# EAGLE board Board_4Layer_R2 (EAGLE 7.3.0)
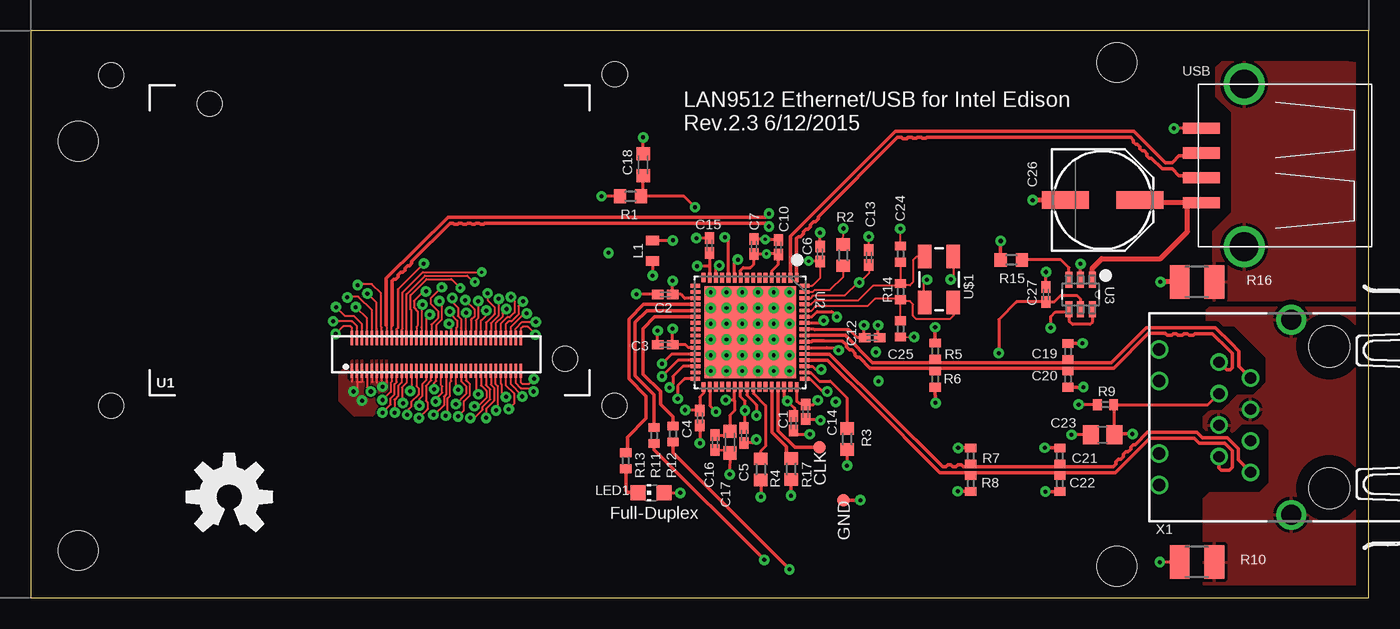
[diagram p0: board, top side]
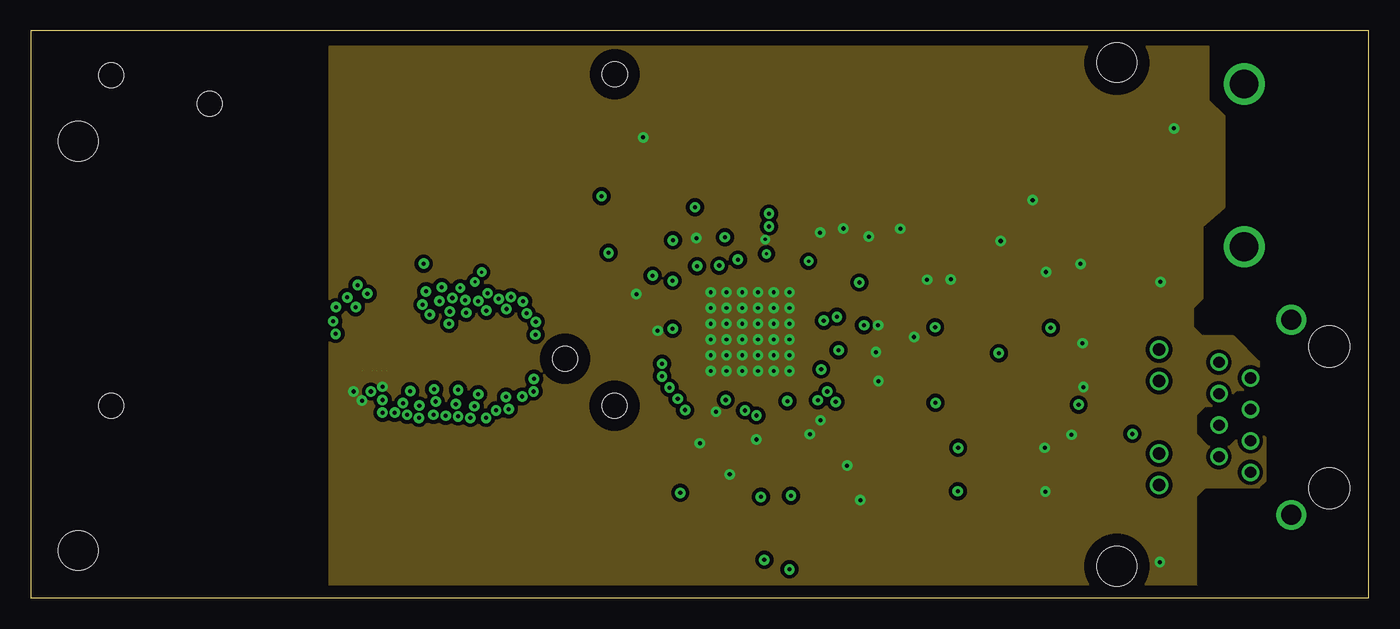
[diagram p1: board, inner layer gnd]
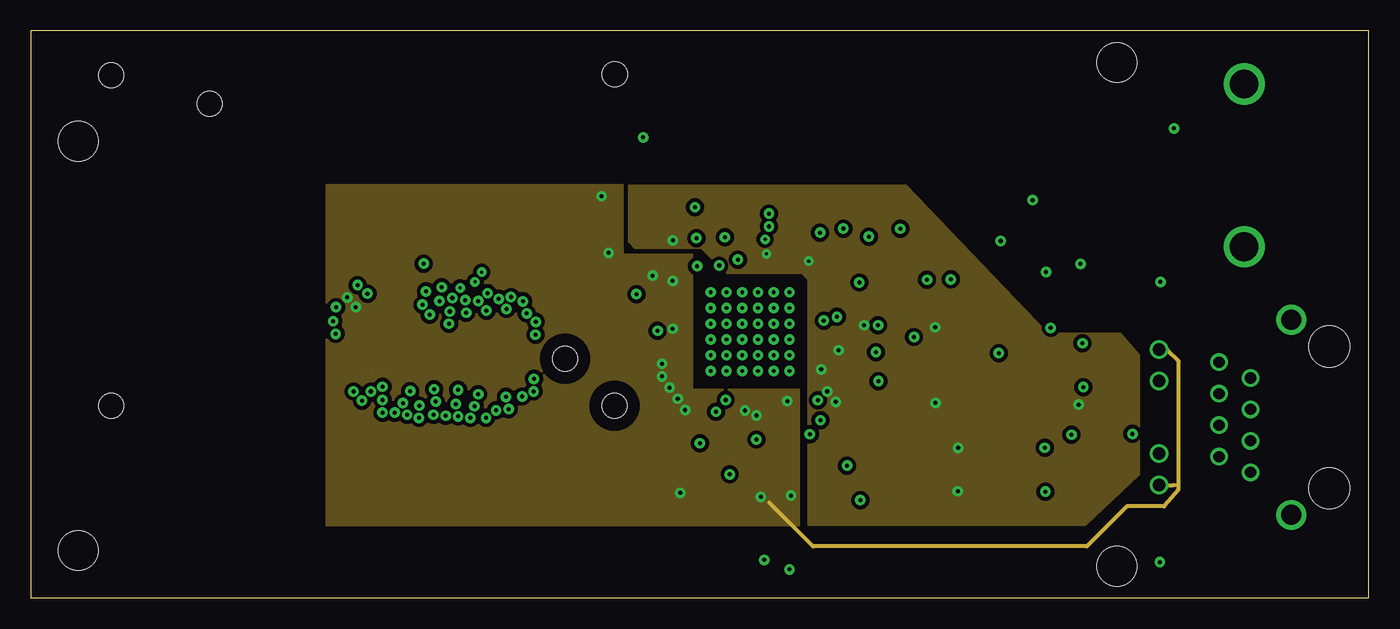
[diagram p2: board, inner layer pwr]
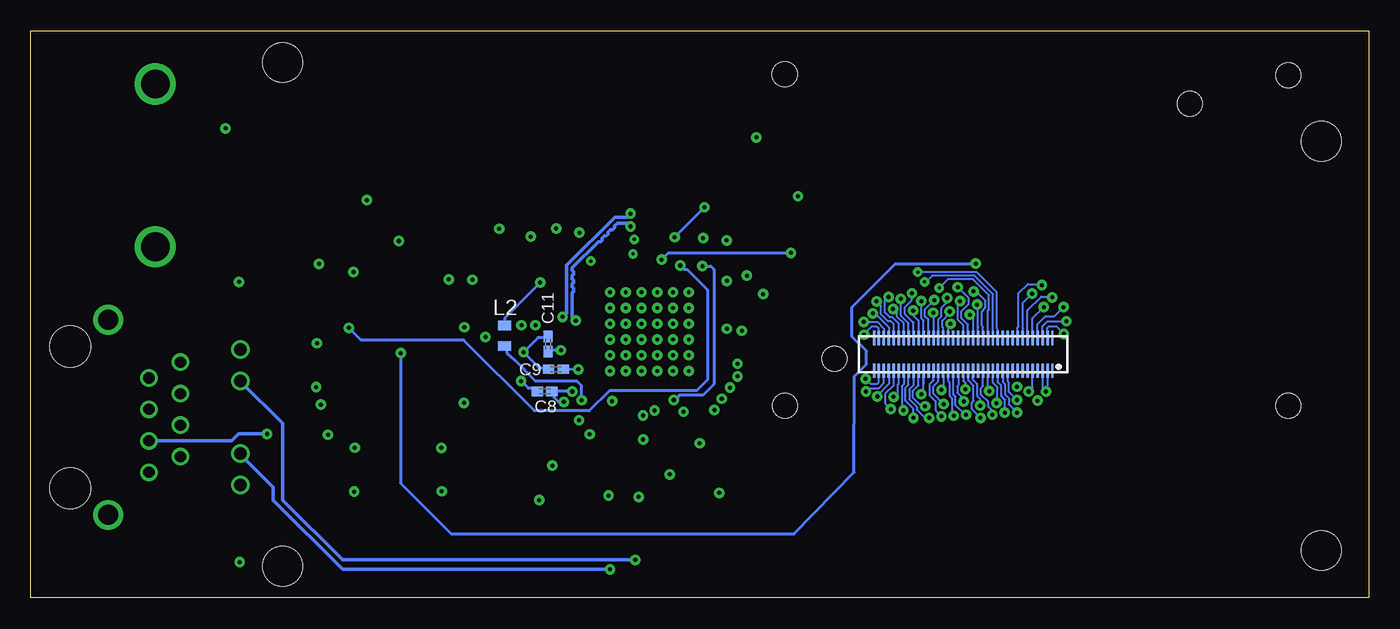
[diagram p3: board, bottom side, seen from below]

Size 107.95 x 45.72 mm. Coordinates in mm from the lower left corner, seen from the top.
Outline: 0,0 107.95,0 107.95,45.72 0,45.72 0,0
Copper layers (1*2*3*16): Top 0.035mm / dielectric 0.2362mm / gnd 0.035mm / dielectric 39mil / pwr 0.035mm / dielectric 0.2362mm / Bottom 0.035mm
Design rules "4pcb Standard Spec": minimum track width 6mil, minimum drill 10mil, track to track 5mil, track to pad 5mil, pad to pad 5mil, via to via 5mil, smd to smd 5mil, copper to edge 40mil, drill to drill 10mil, minimum pad ring 10mil, minimum via ring 10mil, stop-mask expansion 4mil, vias tented up to drill 15mil, thermal gap 10mil
Holes 2 mm at 47.09,15.47 47.12,42.21 6.48,42.14 6.48,15.47
Holes 3.2 mm at 3.81,3.81 3.81,36.83 87.63,43.18 87.63,2.54

## Footprints (pad centres in the part's own frame; a part is rotated, then mirrored left to right if it is on the bottom)
C0402K = smd 0.925 x 0.74: 1 -0.6,0; 2 0.6,0
C0603K = smd 1.05 x 1.08: 1 -0.875,0; 2 0.875,0
C0402 = smd 0.7 x 0.9: 1 -0.65,0; 2 0.65,0
C0805 = smd 1.3 x 1.5: 1 -0.95,0; 2 0.95,0
PANASONIC_E = smd 3.8 x 1.4: + 3,0; - -3,0
TP10R = smd 1 x 1: TP 0,0
L0603 = smd 0.75 x 1.05: 1 -0.825,0; 2 0.825,0
CHIP-LED0805 = smd 1.2 x 1.2: A 0,-1.05; C 0,1.05
R0603 = smd 1 x 1.1: 1 -0.85,0; 2 0.85,0
R0402 = smd 0.7 x 0.9: 1 -0.65,0; 2 0.65,0
R1210 = smd 1.6 x 2.7: 1 -1.4,0; 2 1.4,0
EDISON_DAUGHTER = smd 1.14 x 0.2: 1 1.98,19.17; 2 4.62,19.17; 3 1.98,18.77; 4 4.62,18.77; 5 1.98,18.37; 6 4.62,18.37; 7 1.98,17.97; 8 4.62,17.97; 9 1.98,17.57; 10 4.62,17.57; 11 1.98,17.17; 12 4.62,17.17; 13 1.98,16.77; 14 4.62,16.77; 15 1.98,16.37; 16 4.62,16.37; 17 1.98,15.97; 18 4.62,15.97; 19 1.98,15.57; 20 4.62,15.57; 21 1.98,15.17; 22 4.62,15.17; 23 1.98,14.77; 24 4.62,14.77; 25 1.98,14.37; 26 4.62,14.37; 27 1.98,13.97; 28 4.62,13.97; 29 1.98,13.57; 30 4.62,13.57; 31 1.98,13.17; 32 4.62,13.17; 33 1.98,12.77; 34 4.62,12.77; 35 1.98,12.37; 36 4.62,12.37; 37 1.98,11.97; 38 4.62,11.97; 39 1.98,11.57; 40 4.62,11.57; 41 1.98,11.17; 42 4.62,11.17; 43 1.98,10.77; 44 4.62,10.77; 45 1.98,10.37; 46 4.62,10.37; 47 1.98,9.97; 48 4.62,9.97; 49 1.98,9.57; 50 4.62,9.57; 51 1.98,9.17; 52 4.62,9.17; 53 1.98,8.77; 54 4.62,8.77; 55 1.98,8.37; 56 4.62,8.37; 57 1.98,7.97; 58 4.62,7.97; 59 1.98,7.57; 60 4.62,7.57; 61 1.98,7.17; 62 4.62,7.17; 63 1.98,6.77; 64 4.62,6.77; 65 1.98,6.37; 66 4.62,6.37; 67 1.98,5.97; 68 4.62,5.97; 69 1.98,5.57; 70 4.62,5.57 | hole 2: 23.53,30.67; 2.93,1.98
QFN50P900X900X100-65N = smd 0.762 x 0.305: 1 -4.42,3.759; 16 -4.42,-3.759; 33 4.42,-3.759; 48 4.42,3.759 | smd 0.813 x 0.305: 2 -4.394,3.251; 3 -4.394,2.743; 4 -4.394,2.261; 5 -4.394,1.753; 6 -4.394,1.245; 7 -4.394,0.762; 8 -4.394,0.254; 9 -4.394,-0.254; 10 -4.394,-0.762; 11 -4.394,-1.245; 12 -4.394,-1.753; 13 -4.394,-2.261; 14 -4.394,-2.743; 15 -4.394,-3.251; 34 4.394,-3.251; 35 4.394,-2.743; 36 4.394,-2.261; 37 4.394,-1.753; 38 4.394,-1.245; 39 4.394,-0.762; 40 4.394,-0.254; 41 4.394,0.254; 42 4.394,0.762; 43 4.394,1.245; 44 4.394,1.753; 45 4.394,2.261; 46 4.394,2.743; 47 4.394,3.251 | smd 0.305 x 0.762: 17 -3.759,-4.42; 32 3.759,-4.42; 49 3.759,4.42; 64 -3.759,4.42 | smd 0.305 x 0.813: 18 -3.251,-4.394; 19 -2.743,-4.394; 20 -2.261,-4.394; 21 -1.753,-4.394; 22 -1.245,-4.394; 23 -0.762,-4.394; 24 -0.254,-4.394; 25 0.254,-4.394; 26 0.762,-4.394; 27 1.245,-4.394; 28 1.753,-4.394; 29 2.261,-4.394; 30 2.743,-4.394; 31 3.251,-4.394; 50 3.251,4.394; 51 2.743,4.394; 52 2.261,4.394; 53 1.753,4.394; 54 1.245,4.394; 55 0.762,4.394; 56 0.254,4.394; 57 -0.254,4.394; 58 -0.762,4.394; 59 -1.245,4.394; 60 -1.753,4.394; 61 -2.261,4.394; 62 -2.743,4.394; 63 -3.251,4.394 | smd 7.391 x 7.391: 65 0,0
21-0058I = smd 1.321 x 0.559: 1 -1.194,0.94; 2 -1.194,0; 3 -1.194,-0.94; 4 1.194,-0.94; 5 1.194,0; 6 1.194,0.94
DF40C-70DP-0.4(51) = smd 0.2 x 1.14 bottom: 1 6.8,1.32; 2 6.8,-1.32; 3 6.4,1.32; 4 6.4,-1.32; 5 6,1.32; 6 6,-1.32; 7 5.6,1.32; 8 5.6,-1.32; 9 5.2,1.32; 10 5.2,-1.32; 11 4.8,1.32; 12 4.8,-1.32; 13 4.4,1.32; 14 4.4,-1.32; 15 4,1.32; 16 4,-1.32; 17 3.6,1.32; 18 3.6,-1.32; 19 3.2,1.32; 20 3.2,-1.32; 21 2.8,1.32; 22 2.8,-1.32; 23 2.4,1.32; 24 2.4,-1.32; 25 2,1.32; 26 2,-1.32; 27 1.6,1.32; 28 1.6,-1.32; 29 1.2,1.32; 30 1.2,-1.32; 31 0.8,1.32; 32 0.8,-1.32; 33 0.4,1.32; 34 0.4,-1.32; 35 0,1.32; 36 0,-1.32; 37 -0.4,1.32; 38 -0.4,-1.32; 39 -0.8,1.32; 40 -0.8,-1.32; 41 -1.2,1.32; 42 -1.2,-1.32; 43 -1.6,1.32; 44 -1.6,-1.32; 45 -2,1.32; 46 -2,-1.32; 47 -2.4,1.32; 48 -2.4,-1.32; 49 -2.8,1.32; 50 -2.8,-1.32; 51 -3.2,1.32; 52 -3.2,-1.32; 53 -3.6,1.32; 54 -3.6,-1.32; 55 -4,1.32; 56 -4,-1.32; 57 -4.4,1.32; 58 -4.4,-1.32; 59 -4.8,1.32; 60 -4.8,-1.32; 61 -5.2,1.32; 62 -5.2,-1.32; 63 -5.6,1.32; 64 -5.6,-1.32; 65 -6,1.32; 66 -6,-1.32; 67 -6.4,1.32; 68 -6.4,-1.32; 69 -6.8,1.32; 70 -6.8,-1.32; NC1 7.2,1.32; NC2 7.2,-1.32; NC3 -7.2,-1.32; NC4 -7.2,1.32
CRYSTAL-SMD-5X3 = smd 1.9 x 1.1: 1 -1.85,-1.15; 2 1.85,-1.15; 3 1.85,1.15; 4 -1.85,1.15
USB-A-S = smd 3 x 0.9: D+ 3.45,-1; D- 3.45,1; GND 3.45,-3; VBUS 3.45,3 | drill 2.311: P$5 0,-6.566; P$6 0,6.566
J1 = drill 0.9 pad 1.3: 1 4.445,2.54; 2 3.175,0; 3 1.905,2.54; 4 0.635,0; 5 -0.635,2.54; 6 -1.905,0; 7 -3.175,2.54; 8 -4.445,0 | drill 1 pad 1.422: 9 5.465,7.37; 10 2.925,7.37; 11 -2.925,7.37; 12 -5.465,7.37 | drill 1.6 pad 2.184: M1 -7.875,-3.3; M2 7.875,-3.3 | hole 3.3: 5.715,-6.35; -5.715,-6.35

## Placement (x,y rotation side)
C1  0.1  [C0402K]  61.54,14.07 270 top
C2  0.1  [C0402K]  51.18,24.46 180 top
C3  0.1  [C0402K]  51.18,20.4 180 top
C4  0.1  [C0402K]  53.98,14.48 270 top
C5  0.1  [C0402K]  57.55,13.08 270 top
C6  0.1  [C0402K]  63.69,27.74 90 top
C7  0.1  [C0402K]  58.34,28.33 90 top
C8  0.1  [C0402K]  66.5,16.64 180 bottom
C9  0.1  [C0402K]  65.58,18.42 180 bottom
C10  0.1  [C0402K]  60.33,28.27 90 top
C11  0.1  [C0402K]  66.22,20.47 90 bottom
C12  0.1  [C0402K]  67.89,20.98 0 top
C13  1.0  [C0402K]  67.61,27.46 90 top
C14  0.1  [C0402K]  62.52,15 270 top
C15  0.1  [C0402K]  54.75,28.41 90 top
C16  0.1  [C0402K]  55.2,12.52 270 top
C17  4.7  [C0603K]  56.41,12.55 270 top
C18  0.01uF  [C0603K]  49.4,34.92 90 top
C19  15pF  [C0402]  83.69,19.86 90 top
C20  15pF  [C0402]  83.69,17.63 270 top
C21  15pF  [C0402]  83.03,11.43 90 top
C22  15pF  [C0402]  83.03,9.22 270 top
C23  0.022uF  [C0805]  86.48,13.14 180 top
C24  33pF  [C0402]  70.18,27.71 90 top
C25  33pF  [C0402]  70.18,21.69 270 top
C26  150uF  [PANASONIC_E]  86.49,32.08 0 top
C27  1.0  [C0402K]  81.91,24.46 90 top
CLK_PAD  CLK  [TP10R]  63.65,12.14 0 top
E$2  [OSHW-LOGO-L]  16,8.13 0 top
GNDPAD  GNDPAD  [TP10R]  65.58,7.87 0 top
L1  2.0A 120Ohm  [L0603]  50.18,27.99 90 top
L2  2.0A 120Ohm  [L0603]  69.72,21.13 270 bottom
LED1  Green LED  [CHIP-LED0805]  50.04,8.46 90 top
R1  10K  [R0603]  48.39,32.38 180 top
R2  12K  [R0603]  65.55,27.63 90 top
R3  12.4K  [R0603]  65.86,12.8 270 top
R4  10K  [R0603]  58.91,10.36 270 top
R5  49.9  [R0402]  72.97,19.89 90 top
R6  49.9  [R0402]  72.97,17.63 270 top
R7  49.9  [R0402]  75.84,11.43 90 top
R8  49.9  [R0402]  75.84,9.22 270 top
R9  10  [R0402]  86.71,15.57 180 top
R10  0  [R1210]  94.11,2.87 180 top
R11  330  [R0402]  50.29,13.08 90 top
R12  330  [R0402]  51.82,13.21 90 top
R13  330  [R0402]  48.01,11.05 90 top
R14  1M  [R0402]  70.18,24.69 270 top
R15  56k  [R0603]  79.12,27.25 0 top
R16  0  [R1210]  94.11,25.48 180 top
R17  10K  [R0603]  61.35,10.38 270 top
U1  EDISON_CONNECTOR_FULLMOUNTING_HOLES  [EDISON_DAUGHTER]  45.09,16.33 90 top
U2  LAN9512-JZX  [QFN50P900X900X100-65N]  58.04,21.41 270 top
U3  MAX4995AAUT+  [21-0058I]  84.71,24.46 270 top
U4  EDISON_CONNECTOR_FULLHEADER  [DF40C-70DP-0.4(51)]  32.72,19.63 180 top
U$1  25MHz  [CRYSTAL-SMD-5X3]  73.29,25.67 270 top
USB  USB-A-S  [USB-A-S]  97.92,34.87 180 top
X1  J1011F01P  [J1]  98.42,14.55 90 top

## Library data of the parts
C1-C22 C24 C25 C27 R15 = rcl
C23 R1-R14 R16 R17 = resistor
C26 = SparkFun-Capacitors
CLK_PAD GNDPAD = testpad
E$2 = SparkFun-Aesthetics
L1 L2 = murata-inductors
LED1 = led
U1 U4 = Edison
U2 = Lan9512; MPN: LAN9512-JZX; OC_FARNELL: 2292586; OC_NEWARK: 66W1988; PACKAGE: 64VQFN; SUPPLIER: Microchip
U3 = MAX4995; MANUFACTURER_PART_NUMBER: max4995aaut+; VENDOR: MAXIM
U$1 = SparkFun-FreqCtrl
USB = SparkFun-Connectors
X1 = con-pulse; OC_FARNELL: unknown; OC_NEWARK: unknown

## Nets
CLKOUT: CLK_PAD.TP U2.45
DSUSB_N: U2.1 USB.D-
DSUSB_P: U2.2 USB.D+
GND: C1.2 C2.2 C3.2 C4.2 C5.2 C6.2 C7.2 C8.2 C9.2 C10.2 C11.2 C12.2 C13.2 C14.2 C15.2 C16.2 C17.2 C18.2 C19.2 C20.2 C21.2 C22.2 C23.2 C24.2 C25.2 C26.- C27.2 GNDPAD.TP R2.2 R3.2 R10.2 R15.1 R16.2 U1.1 U1.3 U1.5 U1.9 U1.11 U1.13 U1.15 U2.34 U3.2 U4.1 U4.3 U4.5 U4.9 U4.11 U4.13 U4.15 U$1.2 U$1.4 USB.GND
N$1: C13.1 L2.1 U2.62
N$2: C14.1 L2.2 U2.48
N$3: U2.16
N$4: C15.1 C16.1 C17.1 U2.15 U2.38
N$6: R2.1 U2.63
N$7: C18.1 R1.1 U2.12
N$8: R3.1 U2.50
N$9: R4.1 U2.41
N$10: C23.1 R9.1 X1.3 X1.6
N$15: R11.2 U2.21
N$16: R11.1 X1.10
N$17: R12.1 X1.11
N$18: R12.2 U2.22
N$19: LED1.C R13.1
N$20: R13.2 U2.20
N$21: C24.1 R14.1 U2.61 U$1.1
N$22: C25.1 R14.2 U2.60 U$1.3
N$23: U2.14 U3.4 U3.6
N$25: C26.+ U3.1 USB.VBUS
N$26: R15.2 U3.3
P2: U1.2 U4.2
P4: U1.4 U4.4
P6: U1.6 U4.6
P7: U1.7 U4.7
P12: U1.12 U4.12
P14: U1.14 U4.14
P17: U1.17 U4.17
P19: U1.19 U4.19
P21: U1.21 U4.21
P22: U1.22 U4.22
P23: U1.23 U4.23
P24: U1.24 U4.24
P25: U1.25 U4.25
P26: U1.26 U4.26
P27: U1.27 U4.27
P28: U1.28 U4.28
P30: U1.30 U4.30
P31: U1.31 U4.31
P32: U1.32 U4.32
P33: U1.33 U4.33
P34: U1.34 U4.34
P35: U1.35 U4.35
P36: U1.36 U4.36
P37: U4.37
P39: U1.39 U4.39
P41: U4.41
P42: U1.42 U4.42
P43: U4.43
P44: U1.44 U4.44
P45: U1.45 U4.45
P46: U1.46 U4.46
P47: U1.47
P48: U1.48 U4.48
P50: U1.50 U4.50
P51: U1.51 U4.51
P52: U1.52 U4.52
P53: U4.53
P54: U1.54 U4.54
P55: U1.55 U4.55
P56: U1.56 U4.56
P57: U1.57 U4.57
P58: U1.58 U4.58
P59: U1.59 U4.59
P60: U1.60 U4.60
P61: U1.61
P62: U1.62 U4.62
P63: U1.63 U4.63
P64: U1.64 U4.64
P65: U1.65 U4.65
P66: U1.66 U4.66
P67: U1.67 U4.67
P69: U1.69 U4.69
P70: U1.70
RX_N: C22.1 R8.1 U2.52 X1.7
RX_P: C21.1 R7.1 U2.53 X1.8
S$3: U4.16
S$4: R17.1 U2.44
S$5: U4.70
S$6: U4.20
S$7: U4.68
S$8: U1.68
S$9: U1.53
S$10: U4.61
SHLD: R10.1 X1.4 X1.5 X1.M1 X1.M2
TX_N: C19.1 R5.1 U2.56 X1.2
TX_P: C20.1 R6.1 U2.55 X1.1
USB_VBUS: C27.1 U1.20 U3.5
USBSHLD: R16.1 USB.P$5 USB.P$6
USBUP_N: U1.18 U2.58
USBUP_P: U1.16 U2.59
VDD3IO: C1.1 C2.1 C3.1 C4.1 C5.1 L1.1 LED1.A R1.2 R4.2 R17.2 U1.8 U1.10 U2.11 U2.19 U2.27 U2.28 U2.29 U2.30 U2.32 U2.33 U2.39 U2.40 U2.46 U4.8 U4.10 X1.9 X1.12
VDD33A: C6.1 C7.1 C8.1 C9.1 C10.1 C11.1 C12.1 L1.2 R5.2 R6.2 R7.2 R8.2 R9.2 U2.5 U2.10 U2.49 U2.51 U2.54 U2.57 U2.64

## Tracks (layer width: path | path; a pad name or v marks a point on that pad's centre or on a via)
CLKOUT
  Top 0.27: U2.45 60.3,13.49 61.65,12.14 CLK_PAD.TP
DSUSB_N
  Top 0.254: 93.16,34.05 94.45,33.86 USB.D-
  Top 0.3: U2.1 61.8,28.99 61.94,29.13 62.1,29.13 62.33,29.36 62.33,29.52 62.54,29.72 62.71,29.72 62.92,29.92 62.92,30.1 63.14,30.33 63.32,30.33 63.55,30.56 63.55,30.73 69.94,37.14 69.94,37.13 70.26,37.13 70.36,37.03 70.69,37.03 70.79,37.13 71.09,37.13 71.17,37.06 71.48,37.06 71.55,37.13 71.86,37.13 71.93,37.06 72.24,37.06 72.31,37.13 88.75,37.14 88.98,36.91 88.98,36.75 89.15,36.58 89.31,36.58 89.51,36.37 89.51,36.22 89.69,36.04 89.84,36.04 90.07,35.81 90.07,35.66 90.27,35.46 90.42,35.46 91.29,34.6 92.11,34.6 92.66,34.05 93.16,34.05
DSUSB_P
  Top 0.254: 94.32,35.64 USB.D+
  Top 0.3: U2.2 61.29,29.18 69.75,37.64 88.99,37.64 91.54,35.1 92.11,35.1 92.65,35.64 94.32,35.64
GND  (via drill 0.25, 0.3, 0.33)  (5 unrouted)
  Top 0.127: 56.47,11.9 C17.2
  Top 0.152: U4.3 26.32,16.92 v26.04,16.64 | U1.1 25.91,17.48 25.88,17.45 | U4.5 26.71,17.41 26.72,17.4 26.34,17.4 | 26.29,17.4 26.34,17.4 | 26.34,17.4 26.34,17.42 26.31,17.45 | U4.9 27.52,17.42 27.53,17.4 | U1.11 27.91,17.37 | 27.91,17.37 | U4.13 28.32,17.43 28.32,17.42 | U4.15 28.71,17.36 28.68,17.32
  Top 0.178: C25.2 v71.27,21.03 | 74.44,26.95 74.45,25.88 74.24,25.68 v74.23,25.68 | 72.08,23.89 72.08,25.43 v72.31,25.65 | C24.2 v70.16,29.77 | C13.2 v67.61,29.13 | R2.2 v65.56,29.78
  Top 0.254: USB.GND 92.85,37.87 v92.25,37.86 | U3.2 v84.71,26.93 | 82.08,25.22 C27.2 v81.91,26.28 | C18.2 v49.4,37.13 | C12.2 68.36,21.18 v68.36,21.98 | R3.2 v65.86,10.65 | C17.2 v56.39,9.95 | C3.2 v50.58,21.54 | C2.2 v48.86,24.49 | v58.54,12.76 58.24,12.5 57.57,12.5 C5.2 | U$1.4 74.44,26.95 | U$1.2 72.08,23.89 | R10.2 v91.11,2.87 | C23.2 v83.98,13.14 | C6.2 v63.69,29.45 | C15.2 v53.71,29.01 | C16.2 56.47,11.9 | C4.2 v53.98,12.46 | U2.34 54.79,15.49 v55.28,15 | C14.2 63.63,14.4 v63.71,14.32 v63.72,14.32 | C1.2 61.54,13.26 61.75,13.18 v62.87,13.18 | 66.9,7.87 v66.93,7.87 | C10.2 59.29,28.87 v59.26,28.91 58.37,28.91 C7.2
  Top 0.27: C19.2 83.82,20.52 v84.86,20.52 | C20.2 83.8,16.99 v84.94,16.99 | C21.2 83.06,12.09 83.09,12.09 v81.82,12.09 | C22.2 83.11,8.59 83.11,8.56 v81.87,8.56 | R15.1 78.26,27.23 v78.26,28.78 | GNDPAD.TP 66.9,7.87
  Top 0.406: R16.2 v91.15,25.48 | C26.- v80.84,32.08
  Bottom 0.152: U1.1 25.91,16.76 v26.04,16.64 26.32,16.92 U4.3 | U4.9 27.52,17.88
  Bottom 0.254: C11.2 66.31,20.98 67.03,20.98 v68.2,19.81 66.9,18.52 66.52,18.52 66.33,18.52 C9.2 | C8.2 67.25,16.89 67.79,16.89 v68.4,17.48
  other vias: 54.86,24.64 59.94,23.37 56.13,24.64 57.4,24.64 58.67,24.64 59.94,24.64 54.86,23.37 54.86,22.1 54.86,19.56 58.67,19.56 54.86,20.83 56.13,23.37 57.4,23.37 57.4,22.1 58.67,23.37 61.21,24.64 56.13,22.1 58.67,22.1 59.94,22.1 59.94,20.83 61.21,23.37 56.13,20.83 57.4,20.83 58.67,20.83 59.94,19.56 61.21,22.1 57.4,19.56 54.86,18.29 56.13,19.56 61.21,20.83 61.21,19.56 56.13,18.29 57.4,18.29 58.67,18.29 59.94,18.29 61.21,18.29 28.37,17.02 26.72,15.9
  pour gnd (isolate 0.305): 93.98,0.76 24.13,0.51 24.13,44.45 95,44.45 95,40.13 96.27,38.86 96.27,31.5 94.49,29.97 94.49,24.13 93.73,23.37 93.73,21.84 94.49,21.08 97.03,21.08 99.06,19.05 99.06,17.53 98.3,16.76 97.28,16.76 96.01,15.49 94.74,15.49 93.98,14.73 93.98,13.21 95,12.19 96.77,12.19 98.04,13.46 99.06,13.46 99.57,12.95 99.57,9.4 99.06,8.89 94.74,8.89 93.98,8.13
  pour Top: 25.91,19.15 28.91,19.15 29.06,19 29.06,17.83 28.93,17.7 28.93,16.05 27.56,14.68 26.09,14.68 24.92,15.85 24.92,18.14 25.65,18.9
GP28_I2C_6_SDA  (via drill 0.33)
  Top 0.152: v34.47,14.63 34.95,15.11 34.95,15.85 35.43,16.33 35.43,17.22 35.12,17.54
  Bottom 0.152: v34.47,14.63 34.95,15.11 34.95,15.85 35.43,16.33 35.43,17.22 35.13,17.53 35.12,17.54 35.1,17.55 35.1,18.29
N$1  (via drill 0.33)
  Top 0.127: 62.56,24.16 U2.62
  Top 0.178: 62.56,24.16 62.94,24.16 63.17,24.38 65.68,24.38 66.72,25.43 | 66.72,25.43 v66.85,25.43 | C13.1 67.61,26.16 66.85,25.4 v66.85,25.43 66.72,25.43
  Bottom 0.254: v66.85,25.43 68.12,24.16 69.72,22.54 L2.1
N$2  (via drill 0.33)
  Top 0.127: 61.8,16.97 U2.48
  Top 0.254: 61.8,16.97 61.8,15.91 62.03,15.67 62.46,15.67 | 62.46,15.67 62.56,15.42 C14.1 | v63.5,15.93 63.14,15.57 62.5,15.57 62.76,15.65 62.46,15.67
  Bottom 0.254: v63.5,15.93 63.5,17.09 63.88,17.48 67.23,17.48 68.94,19.18 69.47,19.7 69.55,19.77 69.55,20.14 L2.2
N$4  (via drill 0.33)
  Top 0.127: 56.38,13.12 C17.1
  Top 0.254: 56.77,15.93 56.78,17 U2.38 | 56.77,15.93 56.77,15.06 56.41,14.71 C17.1 | 54.79,26.75 54.79,27.66 C15.1 | U2.15 54.79,26.75 | 54.79,26.75 v53.76,26.75 | v56.07,15.95 56.71,15.95 56.77,15.93 | C16.1 56.38,13.12
  Bottom 0.254: v53.76,26.75 53.09,26.75 52.83,26.49 52.83,17.22 53.72,16.33 55.63,16.33 v56.07,15.95
N$6
  Top 0.178: U2.63 62.64,24.69 63.12,24.69 63.27,24.84 64.49,24.84 65.56,25.91 R2.1
N$7  (via drill 0.33)
  Top 0.254: C18.1 49.4,32.38 R1.1 52.71,32.38 v53.59,31.5 | U2.12 56.29,28.8 v56.01,29.08
  Bottom 0.254: v56.01,29.08 v53.59,31.5
N$8
  Top 0.254: U2.50 62.94,18.16 63.63,17.48 64.52,17.48 65.86,16.13 R3.1
N$9
  Top 0.254: U2.41 58.29,16.49 59.28,15.5 59.28,12.22 58.88,11.81 58.88,11.53 R4.1
N$10  (via drill 0.33)
  Top 0.254: X1.3 94.99,15.57 R9.1 87.43,15.54 C23.1 87.5,13.19
  Top 0.27: 87.5,13.19 87.5,13.21 v88.9,13.21
  Bottom 0.27: X1.6 91.74,12.65 91.19,13.21 v88.9,13.21
N$15
  Top 0.27: U2.21 49.71,23.16 48.77,22.23 48.77,17.91 50.29,16.38 R11.2
N$16  (via drill 0.33)
  Top 0.27: R11.1 50.29,11.94 v59.18,3.05
  Bottom 0.27: v59.18,3.05 82.8,3.05 87.63,7.87 87.63,14.05 X1.10
N$17  (via drill 0.33)
  Top 0.27: R12.1 51.82,11.68 v61.21,2.29
  Bottom 0.27: v61.21,2.29 82.8,2.29 88.39,7.87 88.39,8.89 91.06,11.56 | 91.19,11.68 91.06,11.56 | 91.06,11.56 X1.11
N$18
  Top 0.27: U2.22 50.34,22.66 49.4,21.72 49.4,18.03 50.8,16.64 50.8,15.62 51.82,14.61 R12.2
N$19
  Top 0.27: R13.1 48.01,8.64 48.13,8.51 48.94,8.51 LED1.C
N$20
  Top 0.27: U2.20 49.45,23.67 48.26,22.48 48.26,17.65 49.66,16.26 49.66,14.48 48.13,12.95 48.13,11.81 48.01,11.68 R13.2
N$21
  Top 0.127: 69.96,25.2 R14.1 70.32,25.2
  Top 0.178: U2.61 62.97,23.67 63.3,24 66.8,24 68,25.2 69.96,25.2 | C24.1 R14.1 | U$1.1 71.48,27.52 71.2,27.23 71.2,25.45 70.94,25.2 70.32,25.2
N$22
  Top 0.127: 70.06,24.16 R14.2 70.29,23.93
  Top 0.178: U2.60 62.99,23.16 63.37,23.55 67.54,23.55 68.15,24.16 70.06,24.16 | C25.1 R14.2 | U$1.3 74.44,22.76 74.15,22.47 71.48,22.47 71.2,22.75 71.2,23.67 70.94,23.93 70.29,23.93
N$23  (via drill 0.33)
  Top 0.254: U2.14 55.3,26.54 v55.55,26.8 | U3.6 85.65,22.23 85.47,22.05 84.07,22.05 83.82,22.3 83.82,23.22 U3.4 83.57,23.06 82.68,23.06 82.3,22.68 v82.3,21.77
  Bottom 0.254: v55.55,26.8 55.25,26.49 54.99,26.49 53.34,24.84 53.34,17.6 54.23,16.71 61.24,16.71 62.89,15.06 67.31,15.06 73.02,20.78 81.3,20.78 v82.3,21.77
N$25
  Top 0.254: USB.VBUS 93.34,31.87 | 89.49,31.87 C26.+
  Top 0.406: 89.49,31.87 93.34,31.87 93.34,29.54 91.15,27.35 86.42,27.35 85.65,26.57 U3.1
N$26
  Top 0.254: U3.3 83.77,26.62 83.13,27.25 R15.2
P2  (via drill 0.33)
  Top 0.152: U1.2 25.91,21.76 25.78,21.89 25.2,21.89 v24.59,21.29
  Bottom 0.152: U1.2 25.91,21.76 25.78,21.89 25.2,21.89 v24.59,21.29
P4  (via drill 0.33)
  Top 0.152: U4.4 26.32,21.89 25.91,22.3 v24.38,22.3
  Top 0.178: v24.38,22.3 24.43,22.3
  Bottom 0.152: U4.4 26.32,21.89 25.91,22.3 v24.38,22.3
P6  (via drill 0.33)
  Top 0.152: U4.6 26.71,22.05 26.06,22.71 25.35,22.71 v24.61,23.44
  Bottom 0.152: U4.6 26.71,22.05 26.06,22.71 25.35,22.71 v24.61,23.44
P7  (via drill 0.33)
  Top 0.152: v27.43,16.64 27.11,16.95 U1.7 27.11,18.2 27.1,18.19
  Bottom 0.152: v27.43,16.64 27.11,16.95 27.11,17.78 | 27.11,17.78 27.11,18.18 | U1.7 | U1.7 | U1.7 27.11,17.78 | 27.11,17.78
P12  (via drill 0.33)
  Top 0.152: U1.12 27.91,21.69 27.89,21.72 27.89,23.8 v27.15,24.54
  Bottom 0.152: U1.12 27.91,21.69 27.89,21.72 27.89,23.8 v27.15,24.54
P14  (via drill 0.33)
  Top 0.152: v26.36,25.22 26.44,25.3 27.51,25.3 28.25,24.56 28.25,21.87 28.32,21.8 U4.14
  Bottom 0.152: 28.32,21.57 28.32,21.79 28.25,21.87 28.25,24.56 27.51,25.3 26.44,25.3 v26.36,25.22
  Bottom 0.178: U4.14 28.32,21.56 28.32,21.57
P17  (via drill 0.33)
  Top 0.152: U1.17 29.11,17.43 29.03,17.35 29.03,16.61 v28.37,15.95
  Bottom 0.152: v28.37,15.95 29.03,16.61 29.03,17.35 29.11,17.43 U1.17
P19  (via drill 0.33)
  Top 0.152: v28.37,14.94 29.03,15.6 29.03,16.1 29.34,16.41 29.34,17.22 29.52,17.4 U4.19
  Bottom 0.152: U4.19 29.52,17.4 29.34,17.22 29.34,16.41 29.03,16.1 29.03,15.6 v28.37,14.94
P21  (via drill 0.33)
  Top 0.152: U1.21 29.91,17.37 29.64,17.09 29.64,16.28 29.34,15.98 29.34,14.96 v29.36,14.94
  Bottom 0.152: v29.36,14.94 29.34,14.96 29.34,15.98 29.64,16.28 29.64,17.09 29.91,17.37 29.91,17.8 | 29.91,17.8 29.91,18.18 | U1.21 | U1.21 | U1.21 29.91,17.81 29.91,17.8
P22  (via drill 0.25)
  Top 0.152: U1.22 29.91,21.64 30,21.72 30,24.64 31.62,26.26 v36.37,26.26
  Bottom 0.152: U1.22 29.91,21.64 30,21.72 30,24.64 31.62,26.26 v36.37,26.26
P23  (via drill 0.33)
  Top 0.152: U4.23 30.32,17.34 29.95,16.97 29.95,15.77 v30.02,15.7
  Bottom 0.152: v30.02,15.7 29.95,15.77 29.95,16.97 30.32,17.34 U4.23
P24  (via drill 0.25)
  Top 0.152: v35.84,25.48 35.71,25.48 35.2,25.98 31.8,25.98 30.32,24.5 U4.24
  Bottom 0.152: U4.24 30.32,24.5 31.8,25.98 35.2,25.98 35.71,25.48 v35.84,25.48
P25  (via drill 0.33)
  Top 0.152: U4.25 30.71,16.77 v30.61,16.66
  Bottom 0.152: v30.61,16.66 30.71,16.77 U4.25
P26  (via drill 0.25)
  Top 0.152: U4.26 30.71,23.18 30.63,23.27 30.63,24.41 31.93,25.7 33.93,25.7 v34.65,24.99
  Bottom 0.152: U4.26 30.71,23.18 30.63,23.27 30.63,24.41 31.93,25.7 33.93,25.7 v34.65,24.99
P27  (via drill 0.33)
  Top 0.152: U1.27 31.11,17.07 31.27,16.92 31.27,16.38 30.68,15.8 30.68,15.42 30.35,15.09 v30.35,14.76
  Bottom 0.152: v30.35,14.76 30.35,15.09 30.68,15.42 30.68,15.8 31.27,16.38 31.27,16.92 31.11,17.07 U1.27
P28  (via drill 0.33)
  Top 0.152: v31.88,24.71 31.67,24.71 30.91,23.95 30.91,23.39 31.22,23.09 31.22,21.95 31.11,21.84 U1.28 31.11,20.93
  Bottom 0.152: 31.11,20.93 U1.28 31.11,21.84 31.22,21.95 31.22,23.09 30.91,23.39 30.91,23.95 31.67,24.71 v31.88,24.71
  Bottom 0.178: U1.28 | U1.28 | U1.28 31.11,20.9
P30  (via drill 0.33)
  Top 0.152: v31.6,23.65 31.52,23.57 31.52,21.82 31.52,21.81 U4.30 31.52,20.93
  Bottom 0.152: v31.6,23.65 31.52,23.57 31.52,21.82 31.52,21.81 U4.30 31.52,20.93
P31  (via drill 0.33)
  Top 0.152: v31.34,15.49 31.34,16.03 31.57,16.26 31.57,17.22 31.93,17.58 31.93,18.3 U1.31
  Bottom 0.152: v31.34,15.49 31.34,16.03 31.57,16.26 31.57,17.22 31.93,17.58 31.93,17.78 | 31.93,17.78 31.93,18.01 | U1.31 31.91,17.79 31.93,17.78
P32  (via drill 0.33)
  Top 0.152: v32.18,22.84 31.91,22.57 U1.32 31.91,20.93
  Bottom 0.152: v32.18,22.84 31.91,22.57 U1.32 31.91,20.93
P33  (via drill 0.33)
  Top 0.152: 32.32,17.53 32.31,17.53 | 32.31,17.53 31.88,17.09 31.88,15.88 32,15.75 32,15.21 31.32,14.53 v31.32,14.5 | 32.31,17.53 U1.33 U4.33
  Bottom 0.152: v31.32,14.5 31.32,14.53 32,15.21 32,15.75 31.88,15.88 31.88,17.09 32.31,17.53 | 32.31,17.53 32.32,17.53 | 32.31,17.53 32.31,17.8 | 32.31,17.8 32.31,17.93 | U4.33 32.32,17.81 32.31,17.8
P34  (via drill 0.33)
  Top 0.152: v33.15,25.04 32.26,24.16 32.26,23.7 32.84,23.11 32.84,22.55 32.32,22.03 U4.34 32.32,20.93
  Bottom 0.152: v33.15,25.04 32.26,24.16 32.26,23.7 32.84,23.11 32.84,22.55 32.32,22.03 U4.34 32.32,20.93
P35  (via drill 0.33)
  Top 0.152: v32.54,16.82 32.54,17.32 32.72,17.5 32.72,18.21 U4.35
  Bottom 0.152: v32.54,16.82 32.54,17.32 32.72,17.5 U4.35
P36  (via drill 0.33)
  Top 0.152: v32.97,23.93 33.15,23.75 33.15,22.43 32.72,22 U4.36 32.72,20.93
  Bottom 0.152: v32.97,23.93 33.15,23.75 33.15,22.43 32.72,22 U4.36 32.72,20.93
P37  (via drill 0.33)
  Top 0.152: v32.66,15.82 32.66,16 33.2,16.54 33.2,17.04 33.12,17.13 33.12,18.18
  Bottom 0.152: U4.37 33.12,17.13 33.2,17.04 33.2,16.54 32.66,16 v32.66,15.82
P39  (via drill 0.33)
  Top 0.152: v32.49,14.76 32.54,14.76 33.33,15.54 33.33,16.23 33.5,16.41 U1.39
  Bottom 0.152: v32.49,14.76 32.54,14.76 33.33,15.54 33.33,16.23 33.5,16.41 33.5,17.8 | 33.5,17.8 33.5,17.96 | U1.39 33.52,17.82 33.5,17.8
P41  (via drill 0.33)
  Top 0.152: v33.48,14.68 33.63,14.83 33.63,16.1 33.81,16.28 33.81,17.37 33.91,17.48 | 33.91,17.48 33.92,17.48 | 33.91,17.48 33.91,18.09
  Bottom 0.152: 33.92,17.48 33.91,17.48 | 33.91,17.48 33.81,17.37 33.81,16.28 33.63,16.1 33.63,14.83 v33.48,14.68 | 33.91,17.48 33.91,17.8 | 33.91,17.8 U4.41 | U4.41 33.92,17.81 33.91,17.8
P42  (via drill 0.33)
  Top 0.152: v33.73,22.1 33.92,21.89 33.92,21.3 | 33.92,20.93 33.92,21.3 | 33.92,21.3 33.91,21.31 33.91,21.19 U4.42
  Bottom 0.152: v33.73,22.1 33.92,21.89 U4.42 33.92,20.93
P43  (via drill 0.33)
  Top 0.152: v34.47,16.76 34.32,16.92 34.32,18.18
  Bottom 0.152: U4.43 34.32,16.92 v34.47,16.76
P44  (via drill 0.33)
  Top 0.152: v33.81,23.09 33.81,22.94 34.39,22.35 34.39,21.84 34.32,21.77 34.32,21.21 | 34.32,20.93 | 34.32,20.93 34.32,21.21 | 34.32,21.21 U4.44
  Bottom 0.152: v33.81,23.09 33.81,22.94 34.39,22.35 34.39,21.84 34.32,21.77 U4.44 34.32,20.93
P45  (via drill 0.33)
  Top 0.152: U4.45 34.72,18.34 U4.45 | U4.45 34.72,17.46 35.13,17.04 35.13,16.46 v34.29,15.62 | U4.45
  Bottom 0.152: v34.29,15.62 35.13,16.46 35.13,17.04 34.72,17.46 U4.45
P46  (via drill 0.33)
  Top 0.152: v34.01,24.18 34.01,23.85 34.47,23.39 34.47,22.71 34.7,22.48 34.7,21.74 34.72,21.72 U4.46
  Bottom 0.152: v34.01,24.18 34.01,23.85 34.47,23.39 34.47,22.71 34.7,22.48 34.7,21.74 34.72,21.72 U4.46 34.72,20.93
P47
  Top 0.152: U1.47 35.12,17.54 35.15,17.5
P48  (via drill 0.33)
  Top 0.152: U1.48 35.12,22.97 v35.13,22.99
  Bottom 0.152: v35.13,22.99 35.12,22.97 U1.48 35.12,20.93
P50  (via drill 0.33)
  Top 0.152: v35.05,24 35.79,23.27 35.79,22.68 35.52,22.41 U1.50
  Bottom 0.152: v35.05,24 35.79,23.27 35.79,22.68 35.52,22.41 U1.50 35.52,20.93
P51  (via drill 0.33)
  Top 0.152: U4.51 | U4.51 35.92,16.59 v36.09,16.41 | U4.51 | U4.51
  Bottom 0.152: v36.09,16.41 35.92,16.59 35.92,17.27 | 35.92,17.27 35.92,18.18 | U4.51 35.92,17.27
P52  (via drill 0.33)
  Top 0.152: v36.09,23.93 36.09,22.55 35.92,22.38 U4.52
  Bottom 0.152: v36.09,23.93 36.09,22.55 35.92,22.38 U4.52 35.92,20.93
P53
  Bottom 0.152: U4.53 36.32,17.8
P54  (via drill 0.33)
  Top 0.152: U4.54 36.32,22.34 36.75,22.78 v36.75,23.16
  Bottom 0.152: v36.75,23.16 36.75,22.78 36.32,22.34 U4.54 36.32,20.93
P55  (via drill 0.33)
  Top 0.152: v35.46,14.5 35.79,14.5 36.45,15.16 36.45,15.39 37.06,16 37.06,16.82 36.72,17.16 U4.55
  Bottom 0.152: v35.46,14.5 35.79,14.5 36.45,15.16 36.45,15.39 37.06,16 37.06,16.82 36.72,17.16 U4.55 | U4.55 | U4.55 36.72,17.69 36.73,17.68 36.73,18.3 U4.55
P56  (via drill 0.33)
  Top 0.152: v36.86,24.56 36.86,24 37.41,23.44 37.41,22.89 36.72,22.19 U4.56
  Bottom 0.152: v36.86,24.56 36.86,24 37.41,23.44 37.41,22.89 36.72,22.19 U4.56 36.72,20.93
P57  (via drill 0.33)
  Top 0.152: v36.73,14.5 36.75,14.53 36.75,15.27 37.36,15.88 37.36,16.94 37.12,17.19 U1.57
  Bottom 0.152: U1.57 37.12,17.19 37.36,16.94 37.36,15.88 36.75,15.27 36.75,14.53 v36.73,14.5
  Bottom 0.178: U1.57 | U1.57 37.12,18.29 37.11,18.29 | 37.11,18.26 37.11,18.29 | 37.11,18.29 U1.57
P58  (via drill 0.33)
  Top 0.152: v37.74,24.11 37.72,24.08 37.72,22.76 37.12,22.15 U1.58
  Bottom 0.152: v37.74,24.11 37.72,24.08 37.72,22.76 37.12,22.16 U1.58 37.12,20.93
P59  (via drill 0.33)
  Top 0.152: U1.59 37.52,17.22 37.67,17.07 37.67,15.24 v37.54,15.11
  Bottom 0.152: 37.52,18.18 37.52,17.98 37.52,17.22 37.67,17.07 37.67,15.24 v37.54,15.11
  Bottom 0.178: U1.59 37.52,18.29 37.52,17.98
P60  (via drill 0.33)
  Top 0.152: v38.38,23.29 38.05,22.96 38.05,22.66 37.52,22.12 37.52,21.18 | 37.52,20.93 37.52,21.18 | 37.52,21.18 U1.60
  Bottom 0.152: v38.38,23.29 38.05,22.96 38.05,22.66 37.52,22.12 U1.60 37.52,20.93
P61
  Top 0.152: U1.61 37.92,17.66 37.92,17.65
P61\  (via drill 0.33)
  Top 0.152: 37.92,18.18 37.92,17.28 38,17.2 38,16.54 v38.33,16.2
  Bottom 0.152: v38.33,16.2 38,16.54 38,17.2 37.92,17.28 37.92,18.18
P62  (via drill 0.33)
  Top 0.152: v38.74,24.26 39.04,23.95 39.04,23.01 38.63,22.61 38.43,22.61 37.92,22.09 U4.62
  Bottom 0.152: v38.74,24.26 39.04,23.95 39.04,23.01 38.63,22.61 38.43,22.61 37.92,22.09 U4.62 37.92,20.93
P63  (via drill 0.33)
  Top 0.152: 38.32,18.18 38.32,17.83 38.32,17.16 38.99,16.48 38.99,15.65 v38.56,15.21
  Top 0.178: U4.63 38.32,17.83
  Bottom 0.152: v38.56,15.21 38.99,15.65 38.99,16.48 38.32,17.16 U4.63
P64  (via drill 0.33)
  Top 0.152: v39.7,23.9 39.35,23.55 39.35,22.86 38.79,22.3 38.56,22.3 38.32,22.06 U4.64
  Bottom 0.152: v39.7,23.9 39.35,23.55 39.35,22.86 38.79,22.3 38.56,22.3 38.32,22.06 U4.64 38.32,20.93
P65  (via drill 0.33)
  Top 0.152: v39.65,16.23 39.65,16.31 38.72,17.24 U4.65
  Bottom 0.152: U4.65 38.72,18.36 38.71,18.36 38.71,18.34 U4.65 | U4.65 38.72,17.24 39.65,16.31 v39.65,16.23
  Bottom 0.178: 38.71,18.34 | 38.71,18.34 38.72,18.33 U4.65 38.71,18.34
P66  (via drill 0.33)
  Top 0.152: v40.01,22.94 39.85,22.94 38.72,21.8 U4.66
  Bottom 0.152: v40.01,22.94 39.85,22.94 38.72,21.8 U4.66 38.72,20.93
P67  (via drill 0.33)
  Top 0.152: U1.67 39.12,17.32 39.52,16.92 40.28,16.92 v40.56,16.64
  Bottom 0.152: v40.56,16.64 40.28,16.92 39.52,16.92 39.12,17.32 39.12,17.96 39.12,18.18
  Bottom 0.178: U1.67 | U1.67 | U1.67 39.12,17.96 | 39.12,17.96
P68  (via drill 0.33)
  Top 0.152: 39.12,20.93 39.12,21.72 39.65,22.25 v40.74,22.25
  Bottom 0.152: v40.74,22.25 39.65,22.25 39.12,21.72 39.12,20.93
P69  (via drill 0.33)
  Top 0.152: U1.69 39.52,17.38 39.65,17.25 40.18,17.25 v40.59,17.65
  Bottom 0.152: v40.59,17.65 40.18,17.25 39.65,17.25 39.52,17.38 39.52,17.91 39.52,18.18
  Bottom 0.178: U1.69 39.52,17.91
P70  (via drill 0.33)
  Top 0.152: v40.72,21.21 40.72,21.26 40.11,21.87 39.7,21.87 39.52,21.68 U1.70 39.52,20.93
  Bottom 0.152: 39.52,20.93 39.52,21.68 39.7,21.87 40.11,21.87 40.72,21.26 v40.72,21.21
RX_N
  Top 0.254: C22.1 83.03,10.08 | R8.1 75.69,9.78 | 75.67,10.08 75.64,10.08
  Top 0.27: U2.52 64.29,19.15 64.64,18.8 67.51,15.95 73.35,10.08 75.64,10.08 83.28,10.08 | 75.69,9.78 75.67,10.08 | 83.03,10.08 82.98,10.07 83.28,10.08 | X1.7 95.88,10.46 96.09,10.26 96.7,10.26 96.95,10.52 96.95,11.84 96.34,12.45 94.79,12.45 94.78,12.45 94.28,12.45 93.87,12.86 90.3,12.86 87.53,10.08 83.28,10.08
RX_P
  Top 0.254: C21.1 83.03,10.74 | R7.1 75.69,10.69 | 75.67,10.59 75.64,10.57
  Top 0.27: U2.53 64.43,19.66 64.61,19.48 73.58,10.57 73.84,10.57 73.99,10.72 74.24,10.72 74.4,10.57 74.65,10.57 74.8,10.72 75.11,10.72 75.26,10.57 75.64,10.57 83.03,10.57 | 83.03,10.57 83.06,10.57 87.35,10.57 87.55,10.77 87.55,10.97 87.76,11.18 87.96,11.18 88.16,11.38 88.16,11.56 88.37,11.76 88.54,11.76 88.75,11.96 88.75,12.14 88.95,12.34 89.13,12.34 90.11,13.33 94.11,13.33 94.55,12.89 96.56,12.89 97.45,12 97.45,11.11 X1.8 | 75.69,10.69 75.67,10.59 | 83.03,10.74 83.03,10.57 83.01,10.6 83.03,10.57
S$3
  Bottom 0.178: U4.16 28.73,20.93 U4.16 | U4.16 28.7,20.95 U4.16
S$4
  Top 0.27: U2.44 59.79,13.36 60.96,12.19 60.96,11.21 R17.1
S$6
  Bottom 0.203: U4.20 29.52,20.98
S$9  (via drill 0.33)
  Top 0.152: U1.53 36.32,17.13 36.75,16.69 36.75,16.13 36.07,15.44 v35.79,15.44
  Bottom 0.152: v35.79,15.44 36.07,15.44 36.75,16.13 36.75,16.69 36.32,17.13 36.32,18.18
S$10
  Bottom 0.178: 37.92,18.21 37.92,18.29 | 37.92,18.29 37.92,18.28 U4.61 | 37.92,18.29 U4.61 | U4.61 | U4.61
SHLD
  pour Top (isolate 0.406): 94.61,1.09 94.61,7.95 95.12,8.46 99.19,8.46 99.95,9.22 99.95,13.54 99.44,14.05 97.66,14.05 96.39,12.78 95.38,12.78 94.61,13.54 94.61,14.55 95.12,15.06 96.14,15.06 97.41,16.33 98.68,16.33 99.69,17.35 99.69,19.38 97.16,21.92 95.12,21.92 94.87,22.17 94.87,23.19 95.12,23.44 107.44,23.44 107.44,0.84 94.87,0.84
TX_N
  Top 0.254: 73.24,19.05 73.32,18.97 | 83.68,18.97 85.69,18.97
  Top 0.27: U2.56 64.14,21.16 65.72,21.16 67.91,18.97 73.32,18.97 85.69,18.97 87.2,18.97 90.01,21.79 95.59,21.79 96.86,20.52 97.5,19.88 97.5,18.65 X1.2 | R5.1 73.24,19.05 | C19.1 83.68,18.97
TX_P
  Top 0.27: U2.55 62.99,20.65 63.05,20.71 64,20.71 65.51,20.71 65.81,20.4 65.81,20.24 66.04,19.99 66.27,19.99 66.5,19.74 66.5,19.56 66.67,19.38 66.85,19.38 67.72,18.52 73.24,18.52 | 73.24,18.52 85.74,18.52 | R6.1 72.98,18.51 73.24,18.52 | C20.1 83.75,18.52 85.74,18.52 | X1.1 96.52,18.37 96.78,18.37 96.95,18.54 96.95,19.71 96.67,19.99 95.35,21.31 93.93,21.31 93.8,21.18 93.47,21.18 93.34,21.31 93.04,21.31 92.91,21.18 92.56,21.18 92.43,21.31 92.2,21.31 92.08,21.18 91.72,21.18 91.59,21.31 91.57,21.31 91.56,21.32 90.18,21.32 87.38,18.52 85.74,18.52
USB_VBUS  (via drill 0.33)
  Top 0.203: U1.20 | U1.20 29.52,21.67 29.62,21.77 29.62,24.87 v31.7,26.95
  Top 0.254: U3.5 84.71,24.11 84.43,24.38 83.11,24.38 82.58,23.86 C27.1 79.54,23.86 78.1,22.43 v78.1,19.74
  Bottom 0.254: v78.1,19.74 78.13,9.25 74.04,5.16 46.36,5.16 41.53,10.11 41.5,17.86 40.51,18.85 40.51,19.91 41.68,21.06 41.68,23.43 38.18,26.95 v31.7,26.95
USBSHLD
  pour Top (isolate 0.406): 95.38,23.95 95.38,29.54 96.9,31.06 96.9,39.19 95.63,40.46 95.63,42.75 96.14,43.26 106.3,43.26 107.44,43.13 107.31,23.95
USBUP_N  (via drill 0.33)
  Top 0.15: U1.18
  Top 0.178: 29.11,20.97 29.11,20.98 | 29.11,20.99 29.11,21.95 29.16,22 | U1.18 29.11,20.97 | 29.11,20.97 29.11,20.98 | 29.11,20.98 | 29.11,20.98 29.11,20.99 | 29.11,20.99 29.11,20.98
  Top 0.248: 36.53,30.12 36.63,30.23 | U2.58 63.78,22.17 63.98,22.38 v63.98,22.35 | 29.16,25.53 29.16,25.58
  Top 0.282: 36.53,30.12 36.27,30.12 36.17,30.23 35.92,30.23 35.81,30.12 35.59,30.12 35.48,30.23 35.23,30.23 35.13,30.12 34.87,30.12 34.77,30.23 34.52,30.23 34.42,30.12 34.16,30.12 34.06,30.23 33.81,30.23 30.73,27.15 30.73,26.98 30.56,26.8 30.38,26.8 30.18,26.59 30.18,26.42 30,26.24 29.82,26.24 29.62,26.04 29.62,25.88 29.41,25.68 29.26,25.68 29.16,25.58 | 36.63,30.23 59.28,30.23 v59.56,29.95 | 29.16,22 29.16,25.53
  Bottom 0.248: 64.26,25.73 64.16,25.63
  Bottom 0.282: v59.56,29.95 59.84,30.23 60.63,30.23 60.83,30.02 60.83,29.84 61.01,29.67 61.19,29.67 61.37,29.49 61.37,29.34 61.52,29.18 61.67,29.18 61.85,29.01 61.85,28.85 61.98,28.73 62.13,28.73 64.26,26.62 64.26,26.42 64.16,26.31 64.16,26.09 64.26,25.98 64.26,25.73 | 64.16,25.63 64.16,25.43 64.26,25.32 64.26,25.07 64.16,24.97 64.16,24.69 64.26,24.59 64.26,22.63 v63.98,22.35
USBUP_P  (via drill 0.33)
  Top 0.127: 62.46,22.66 U2.59
  Top 0.178: U1.16 28.73,21.57 28.73,22.05 28.68,22
  Top 0.248: 62.46,22.66 62.92,22.66 63.02,22.66 63.45,23.09 64.64,23.09 64.67,23.06 v65.05,22.66
  Top 0.282: v59.56,30.99 59.31,30.71 33.66,30.71 28.68,25.76 28.68,22
  Bottom 0.248: v65.05,22.66 64.75,22.96
  Bottom 0.282: v59.56,30.99 59.82,30.71 60.81,30.71 64.75,26.82 64.75,22.96
VDD3IO  (via drill 0.33)
  Top 0.127: U2.40 57.79,16.84 | 53.95,15.14 C4.1
  Top 0.152: U1.8 27.11,22.54 v26.21,23.44 | v25.53,24.23 25.58,24.28 26.42,24.28 27.52,23.18 U4.10
  Top 0.254: L1.1 v50.18,25.99 | v51.78,25.56 51.78,24.65 C2.1 52.45,24.46 52.76,24.16 U2.19 | U2.32 52.76,17.65 52.2,17.09 v52.2,16.05 | U2.30 52.63,18.67 51.82,17.86 51.82,17.22 v51.54,16.94 | U2.29 52.22,19.15 v50.93,17.86 | U2.28 51.71,19.66 v50.93,18.87 | U2.27 53.06,20.17 52.83,20.4 C3.1 51.78,21.5 v51.78,21.7 | U2.33 54.28,16.51 53.98,16.2 C4.1 | 53.95,15.14 v52.8,15.14 | C5.1 57.63,13.76 57.63,13.79 v57.63,15.1 57.63,15.86 57.28,16.2 U2.39 | U2.40 57.79,16.33 58.55,15.56 v58.55,14.7 | U2.46 60.78,16.12 v61.05,15.86 61.62,15.28 61.62,15.11 C1.1 | LED1.A v52.4,8.46 | R4.2 v58.91,8.13 | U2.11 56.79,27.03 v57.05,27.28 | R1.2 v46.05,32.38 | v61.34,8.23 61.34,8.38
  Top 0.27: R17.2 61.35,8.52 61.34,8.38 61.34,8.33
  pwr 0.305: X1.9 91.69,20.02 92.58,19.13 92.58,9.09 | 92.58,9.09 92.58,8.71 91.44,7.37 88.44,7.37 85.22,4.14 63.12,4.14 59.56,7.7 | X1.12 92.21,9.09 92.58,9.09
  Bottom 0.152: U1.8 27.11,22.54 v26.21,23.44 | U4.10 27.52,23.18 26.42,24.28 25.58,24.28 v25.53,24.23
  Bottom 0.254: v57.05,27.28 56.52,27.81 v46.61,27.81
  pour pwr (isolate 0.305): 47.75,27.69 53.34,27.69 53.34,16.76 61.98,16.76 61.98,5.84 23.88,5.84 23.88,33.27 47.75,33.27
VDD33A  (via drill 0.25, 0.33)
  Top 0.127: U2.51 | 62.48,17.6 U2.49 | 62.41,20.17 U2.54
  Top 0.178: U2.64 63.07,25.17 63.7,25.81 63.7,27.1 63.68,27.13 C6.1
  Top 0.254: L1.2 v51.8,28.83 | R9.2 v84.55,15.57 | U2.5 59.79,26.38 60.32,26.9 60.33,26.9 60.33,27.64 C10.1 | U2.10 57.28,26.42 57.48,26.62 58.06,26.62 58.34,26.9 C7.1 v59.36,27.73 v59.36,27.74 60.3,27.74 | U2.51 63.07,18.67 63.32,18.41 v63.78,18.41 | U2.49 62.87,17.67 63.89,16.64 v64.26,16.64 | 62.41,20.17 64.24,20.17 64.97,20.17 v65.18,19.96 | U2.57 63.18,21.67 63.23,21.61 66.06,21.61 66.65,21.03 67.24,21.03 | C6.1 62.65,27.14 v62.76,27.15 | 67.24,21.03 C12.1 | 67.24,21.03 67.24,21.87 v67.23,21.98
  Top 0.27: R7.2 v74.83,12.09 | R8.2 v74.8,8.59
  Top 0.3: R5.2 v72.97,21.82 | R6.2 v73,15.72
  Top 0.305: 60.3,27.74 60.33,27.64
  Bottom 0.254: v63.78,18.41 v63.79,18.41 C9.1 | v65.18,19.96 66.03,19.96 66.26,19.94 C11.1 | v64.26,16.64 C8.1 65.73,16.73 65.73,16.41 65.74,16.16 65.38,15.8 v64.95,15.8
  pour pwr (isolate 0.305): 62.74,5.84 62.74,25.65 62.23,26.16 56.13,26.16 54.1,28.19 48.77,28.19 48.26,28.7 48.26,33.27 70.61,33.27 82.04,21.34 87.88,21.34 89.41,19.56 89.41,9.91 85.09,5.84

## Text on the board
tPlace: LAN9512 Ethernet/USB for Intel Edison / Rev.2.3 6/12/2015 | CLK | Full-Duplex | GND
tDocu: Designed By: Asa Graf